# Altium PCB PD Breakout.PcbDoc
Units mm, origin at the board's own origin, x right, y up, seen from the top; angles counter-clockwise.
Board outline 32.38 x 43.05 mm, 2 copper layers (Top Layer, Bottom Layer), stack 1.569 mm thick; 41 components, 22 nets, 104 pads, 19 vias.
Unrouted connection lines stored in the file: 7.
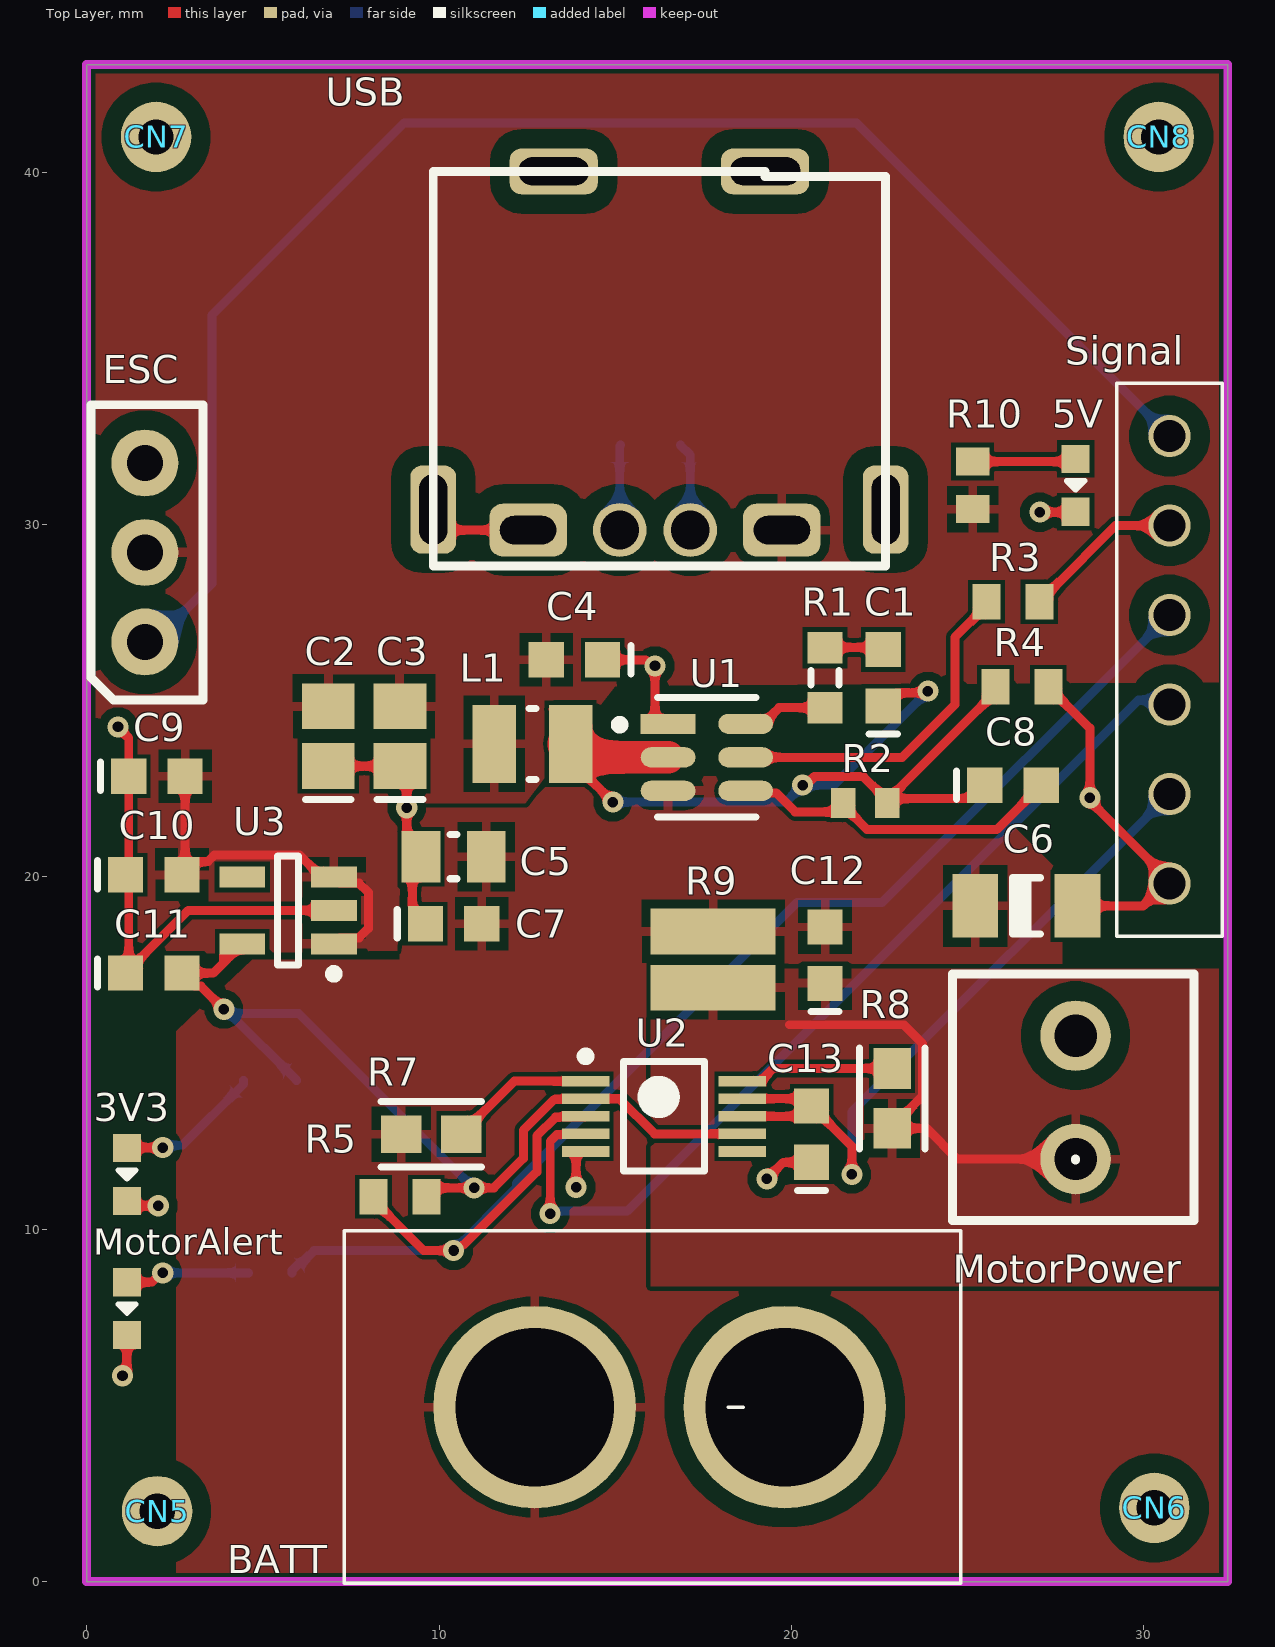
[diagram p0: Top Layer view]
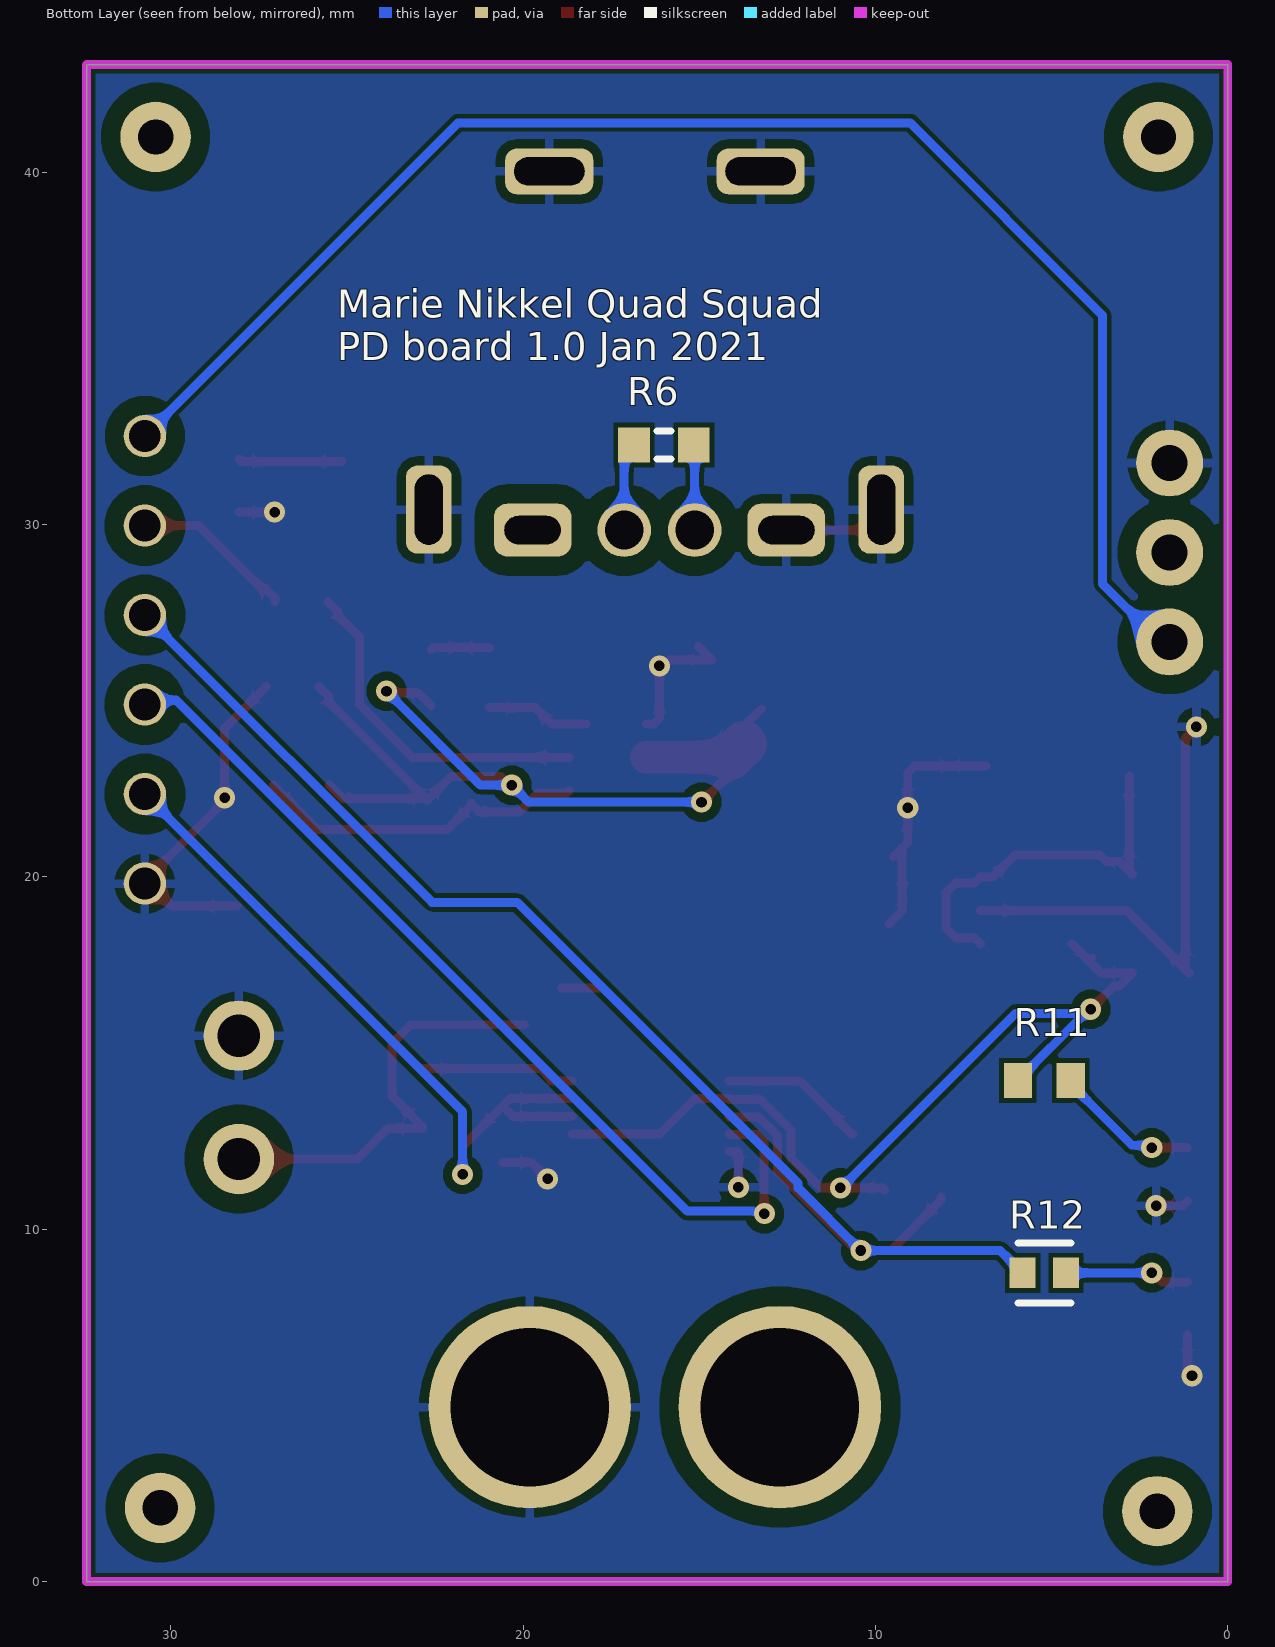
[diagram p1: Bottom Layer view, seen from below]
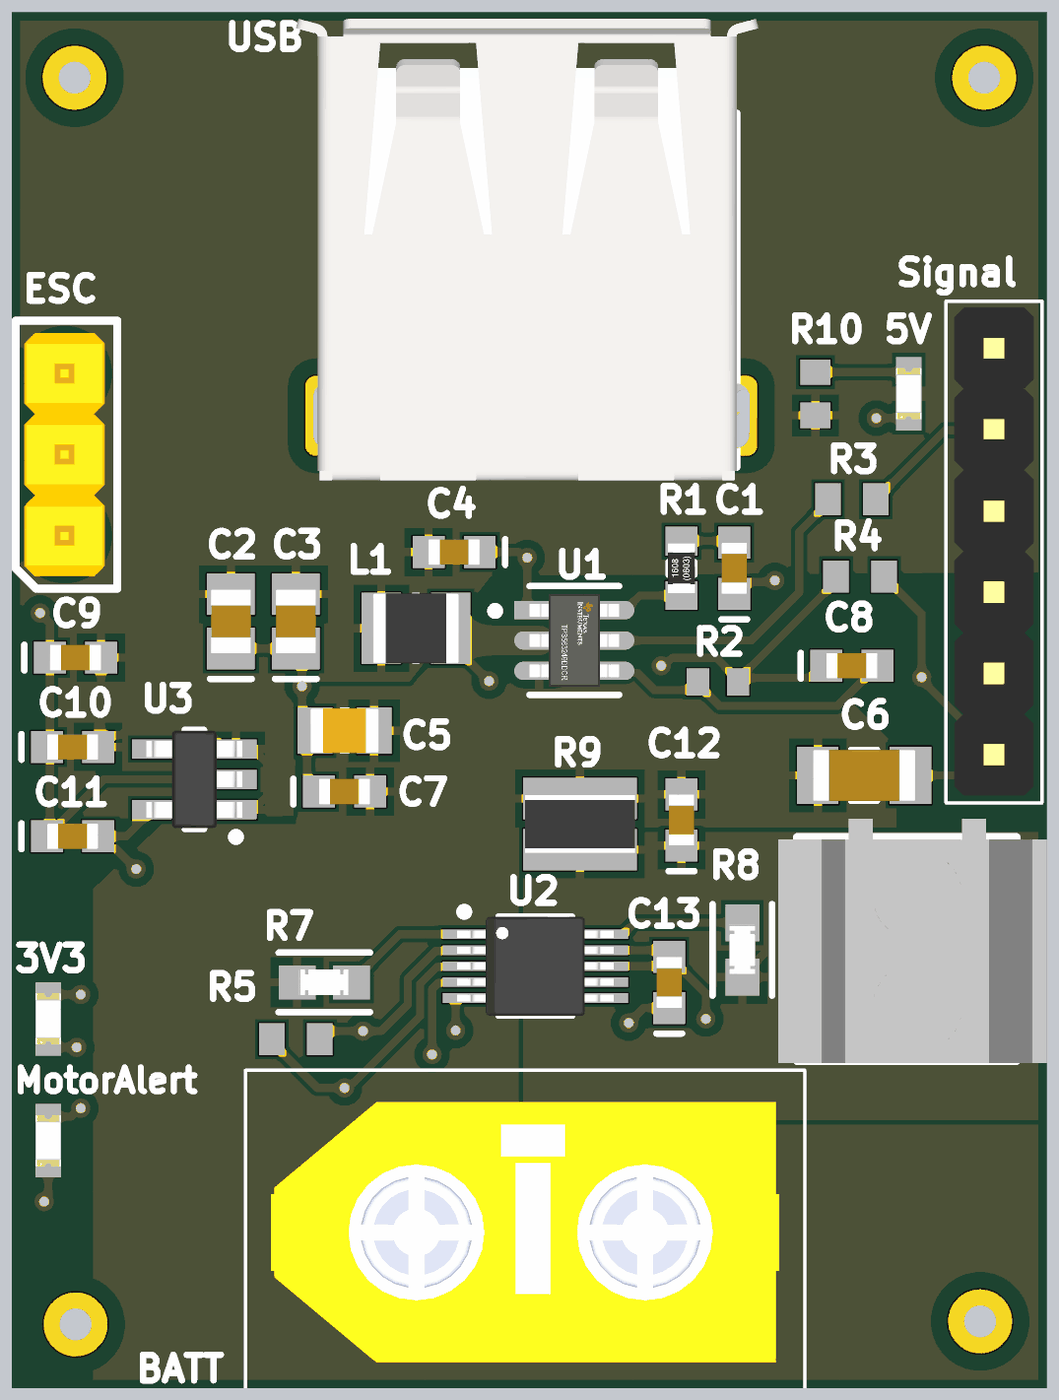
[diagram p2: 3D render of the assembled board from above, using the file's embedded part models]

## Layer stack, top to bottom
Top Solder: solder mask 0.0254, SM-001, Dk 4
Top Layer: signal copper 0.035
Dielectric 1: core 1.4986, Core-043, Dk 4.3
Bottom Layer: signal copper 0.035
Bottom Solder: solder mask 0.0254, SM-001, Dk 4

## Board outline
0,0 0,43.053 32.385,43.053 32.385,0

## Design rules (kind name [scope] priority, off if disabled: settings)
Clearance [All] p1: gap=0.254 ignorepadtopadclearanceinfootprint=TRUE except(0: Arc-Hole Track-Hole SMDPad-Hole THPad-Hole Via-Hole Fill-Hole Poly-Hole Region-Hole Text-Hole; 0.127: Arc-Arc Arc-Track Arc-Fill Arc-Poly Arc-Region Track-Track Track-Fill Track-Poly Track-Region SMDPad-SMDPad SMDPad-Fill SMDPad-Poly SMDPad-Region Fill-Fill Fill-Poly Fill-Region Poly-Poly Poly-Region Region-Region; 0.2: Arc-SMDPad Arc-THPad Track-SMDPad Track-THPad; 0.54: THPad-THPad THPad-Fill THPad-Poly THPad-Region)
HoleSize [All] p1: absolutevalues=TRUE maxlimit=4 minlimit=0.025 maxpercent=80.000 minpercent=20.000
PolygonConnect [All] p1: connectstyle=Relief reliefconductorwidth=0.254 reliefentries=4 polygonreliefangle="90 Angle" airgapwidth=0.254
RoutingVias [All] p1: holewidth=0.711 width=1.27 viastyle="Through Hole" minholewidth=0.711 minwidth=1.27 maxholewidth=0.711 maxwidth=1.27
SolderMaskExpansion [All] p1: expansion=0.05 istentingtop=FALSE
Width [All] p1: maxlimit=12.7 minlimit=0.127 preferedwidth=0.305 minimp=50.000000 maximp=50.000000 favimp=50.000000
29 further rules are at their usual default settings.

## Components (designator, comment, footprint, x,y, rotation, side; value= is the part's Value field where it differs from the comment)
3V3 "LT Q39G-Q1OO-25-1" FP-LB_Q39E-MFG 1.143,11.557 r90 top (schematic designator D2)
5V "LBQ39E-N1OO-35-1" FP-LB_Q39E-MFG 28.067,31.115 r90 top (schematic designator D1)
BATT "XT-60, Male, 1x2, Through hole" "XT-60 Male" 19.812,4.953 r180 top (schematic designator CN1)
C1 "0.1uF, 50V, 10%, X7R, 0603" "CAPC1608N(0603\")" 22.606,25.654 r90 top
C2 "22uF 35V 0805 SMD, Ceramic" "CAPC2012N(0805\")" 6.858,23.995 r90 top value=22µF
C3 "22uF 35V 0805 SMD, Ceramic" "CAPC2012N(0805\")" 8.89,23.995 r90 top value=22µF
C4 "Placeholder_Capacitor_0603" "CAPC1608N(0603\")" 13.843,26.162 r180 top value=DNP
C5 "10uF, 25V, X5R, 0805" CAPC2013X12N 10.414,20.574 r180 top
C6 "Placeholder_Capacitor_1206" "CAPC3216N(1206\")" 26.67,19.177 r180 top value=DNP
C7 "0.1uF, 50V, 10%, X7R, 0603" "CAPC1608N(0603\")" 10.414,18.669 r0 top
C8 "Placeholder_Capacitor_0603" "CAPC1608N(0603\")" 26.289,22.606 r0 top value=DNP
C9 "1uF 25V 0603 SMD, Ceramic" "CAPC1608N(0603\")" 1.994,22.86 r0 top value=1µF
C10 "0.1uF 16V 0603 SMD, Ceramic" "CAPC1608N(0603\")" 1.905,20.066 r0 top value=0.1µF
C11 "4.7uF 10V 0603 SMD, Ceramic" "CAPC1608N(0603\")" 1.905,17.272 r0 top value=4.7µF
C12 "0.1uF, 50V, 10%, X7R, 0603" "CAPC1608N(0603\")" 20.955,17.78 r90 top
C13 "10 nF, 50V 0603 SMD, Ceramic" "CAPC1608N(0603\")" 20.574,12.7 r90 top value=10nF
CN5 "Plated Hole, 1mm" PLATED_HOLE_1mm#1 2,2 r90 top locked
CN6 "Plated Hole, 1mm" PLATED_HOLE_1mm#2 30.39,2 r90 top locked
CN7 "Plated Hole, 1mm" PLATED_HOLE_1mm#3 2,41.05 r90 top locked
CN8 "Plated Hole, 1mm" PLATED_HOLE_1mm#4 30.39,41.05 r90 top locked
ESC "Header, Male, 1x3, Pitch: 0.1\" (2.54mm), THT" "Header, Male, 1x3, Pitch: 0.1\" (2.54mm),THT" 1.651,29.21 r90 top (schematic designator CN3)
L1 "DFE252012P-1R5M=P2" INDC2520X12N 12.649,23.777 r180 top
MotorAlert "LSQ976-NR-1" FP-LB_Q39E-MFG 1.143,7.747 r90 top (schematic designator D3)
MotorPower "2x1 Terminal Block 3.5mm" "2x1 Terminal Block 3.5mm-Footprint-1" 28.067,13.744 r90 top (schematic designator J1)
R1 "0R, 1%, 1/10W, 0603 SMD" "RESC1608N(0603\")" 20.955,25.654 r90 top value=0R
R2 "ERJ-3EKF7322V" RESC1608X55X30LL15T15 22.098,22.098 r0 top
R3 "RC0603FR-0710KL" RESC1608X55X25ML10T15 26.289,27.813 r0 top
R4 "RC0603FR-0710KL" RESC1608X55X25ML10T15 26.543,25.4 r180 top
R5 "RC0603FR-0710KL" RESC1608X55X25ML10T15 8.89,10.922 r0 top
R6 "0R, 1%, 1/10W, 0603 SMD" "RESC1608N(0603\")" 16.002,32.258 r180 bottom value=0R
R7 "ERJ3EKF10R0V" FP-ERJ3EK-IPC_A 9.779,12.7 r180 top
R8 "ERJ3EKF10R0V" FP-ERJ3EK-IPC_A 22.86,13.716 r270 top
R9 "3mR, 1%, 1W, 1206" RESC1632X07M 17.78,17.653 r270 top
R10 "ERJ-3EKF5360V" RESC1608X55X30NL15T15 25.146,31.115 r90 top
R11 "RC0603FR-07110RL" RESC1608X55X25ML10T15 5.207,14.224 r180 bottom
R12 "CRCW0603330RFKEA" FP-CRCW0603-e3-IPC_C 5.207,8.763 r180 bottom
Signal "Header, Male, 1x6" "Header, Male, 1X6" 30.734,19.812 r90 top (schematic designator CN4)
U1 "TPS563249DDCR" FP-DDC0005A-IPC_B 17.602,23.396 r0 top
U2 "INA381A3IDGSR" TSSOP50P490X110-10N 16.383,13.208 r0 top
U3 "LP2981-33DBVR" SOT95P280X145-5N 5.715,19.05 r180 top
USB "USB - Type A Female" "USB - Type A Female-Footprint-1" 16.129,29.845 r180 top (schematic designator CN2)

## Footprints (in the part's own frame and the unit in brackets; to place one, negate y for a bottom-side part, rotate by r counter-clockwise, add the part's x,y. Pads: shape width x height; smd on the part's side, far side on the other; paste and mask are expansions set on the pad)
"2x1 Terminal Block 3.5mm-Footprint-1" [mm]
  round 2 hole 1.2: 1(-1.75,0) 2(1.75,0)
  silkscreen extent -3.5,-3.37 3.5,3.49, body extent -3.57,-4.32 4.08,4.08, height 13.05
"CAPC1608N(0603\")" [mm] "Chip Capacitor, Body 1.6x0.8mm (0603\"), IPC Medium Density"
  rect 1x1 smd: 1(-0.8,0) 2(0.8,0)
  silkscreen extent -1.6,-0.4 -1.6,0.4, body extent -0.8,-0.4 0.8,0.4, height 0.9
"CAPC2012N(0805\")" [mm] "Chip Capacitor, Body 2.0x1.3mm (0805\"), IPC Medium Density"
  rect 1.3x1.5 smd: 1(-0.85,0) 2(0.85,0)
  silkscreen extent -1.8,-0.65 -1.8,0.65, body extent -1,-0.62 1,0.63, height 1
CAPC2013X12N [mm] "Chip Capacitor, 2-Leads, Body 2.05x1.30mm, IPC Medium Density"
  rect 1.1x1.45 smd: 1(-0.925,0) 2(0.925,0)
  silkscreen extent -0.1,-0.63 0.1,0.63, body extent -1.07,-0.7 1.07,0.7, height 1.25
"CAPC3216N(1206\")" [mm] "Chip Capacitor, Body 3.2x1.6mm (1206\"), IPC Medium Density"
  rect 1.3x1.8 smd: 1(-1.45,0) 2(1.45,0)
  silkscreen extent -0.4,-0.8 0.4,0.8, body extent -1.6,-0.8 1.6,0.8, height 1
FP-CRCW0603-e3-IPC_C [mm]
  rect 0.735x0.862 smd paste+0 mask+0: 1(-0.615,0) 2(0.615,0)
  silkscreen extent -0.75,-0.85 0.75,0.85, body extent -0.77,-0.42 0.78,0.42, height 0.5
FP-DDC0005A-IPC_B [mm]
  rect 1.554x0.572 smd paste+0 mask+0: 1(-1.1,0.95)
  rrect100% 1.554x0.572 smd paste+0 mask+0: 2(-1.1,0) 3(-1.1,-0.95) 4(1.1,-0.95) 5(1.1,0) 6(1.1,0.95)
  silkscreen extent -2.6,-1.7 1.4,1.7, body extent -2.13,-1.7 2.13,1.7, height 0.25
FP-ERJ3EK-IPC_A [mil]
  rect 45.53x41.82 smd paste+0 mask+0: 1(-33.5,0) 2(33.5,0)
  silkscreen extent -56,-37 56,37, body extent -76,-41 76,41, height 10
FP-LB_Q39E-MFG [mm]
  rect 0.8x0.8 smd paste+0 mask+0: 1(-0.75,0) 2(0.75,0)
  silkscreen extent -0.13,-0.25 0.13,0.25, body extent -1.25,-0.55 1.25,0.55, height 0.25
"Header, Male, 1x3, Pitch: 0.1\" (2.54mm),THT" [mm]
  round 1.9 hole 1.016: 1(-2.54,0) 2(0,0) 3(2.54,0)
  silkscreen extent -4.19,-1.65 4.19,1.52, body extent -3.81,-1.27 3.81,1.27, height 9.5
"Header, Male, 1X6" [mm]
  round 1.2 hole 0.9: 1(0,0) 2(2.54,0) 3(5.08,0) 4(7.62,0) 5(10.16,0) 6(12.7,0)
  silkscreen extent -1.5,-1.5 14.2,1.5, body extent -1.27,-1.24 14,1.25, height 8.54
INDC2520X12N [mm] "Chip Inductor, 2-Leads, Body 2.50x2.00mm, IPC Medium Density"
  rect 1.23x2.22 smd: 1(-1.085,0) 2(1.085,0)
  silkscreen extent -0.1,-1.01 0.1,1.01, body extent -1.35,-1.1 1.35,1.1, height 1.2
PLATED_HOLE_1mm#1 [mm]
  round 2 hole 1: 1(0,0)
PLATED_HOLE_1mm#2 [mm]
  round 2 hole 1: 1(0.095,0.09)
PLATED_HOLE_1mm#3 [mm]
  round 2 hole 1: 1(-0.048,0.032)
PLATED_HOLE_1mm#4 [mm]
  round 2 hole 1: 1(-0.048,-0.037)
"RESC1608N(0603\")" [mm] "Chip Resistor, Body 1.6x0.8mm (0603\"), IPC Medium Density"
  rect 0.9x1 smd: 1(-0.85,0) 2(0.85,0)
  silkscreen extent -0.2,-0.4 0.2,0.4, body extent -0.77,-0.42 0.78,0.43, height 0.44
RESC1608X55X25ML10T15 [mm] "Chip Resistor, 2-Leads, Body 1.60x0.80mm, IPC Low Density"
  rect 0.8x1 smd: 1(-0.75,0) 2(0.75,0)
  body extent -0.85,-0.45 0.85,0.45, height 0.55
RESC1608X55X30LL15T15 [mm] "Chip Resistor, 2-Leads, Body 1.60x0.80mm, IPC High Density"
  rect 0.7x0.85 smd: 1(-0.625,0) 2(0.625,0)
  body extent -0.87,-0.48 0.87,0.48, height 0.55
RESC1608X55X30NL15T15 [mm] "Chip Resistor, 2-Leads, Body 1.60x0.80mm, IPC Medium Density"
  rect 0.8x0.95 smd: 1(-0.675,0) 2(0.675,0)
  body extent -0.87,-0.48 0.87,0.48, height 0.55
RESC1632X07M [mm] "Chip Resistor, 2-Leads, Body 1.60x3.20mm, IPC Low Density"
  rect 1.3x3.55 smd: 1(-0.8,0) 2(0.8,0)
  body extent -0.9,-1.73 0.9,1.72, height 0.7
SOT95P280X145-5N [mm] "SOT23, 5-Leads, Body 2.90x2.80mm, Pitch 0.95mm, IPC Medium Density"
  rect 1.3x0.6 smd: 1(-1.3,0.95) 2(-1.3,0) 3(-1.3,-0.95) 4(1.3,-0.95) 5(1.3,0.95)
  silkscreen extent -1.43,-1.55 0.3,1.92, body extent -1.5,-1.53 1.5,1.53, height 1.45
TSSOP50P490X110-10N [mm] "TSSOP, 10-Leads, Body 3.00x3.00mm, Pitch 0.50mm, IPC Medium Density"
  rect 1.35x0.3 smd: 1(-2.225,1) 2(-2.225,0.5) 3(-2.225,0) 4(-2.225,-0.5) 5(-2.225,-1) 6(2.225,-1) 7(2.225,-0.5) 8(2.225,0) 9(2.225,0.5) 10(2.225,1)
  silkscreen extent -2.35,-1.55 1.15,1.82, body extent -2.45,-1.55 2.45,1.55, height 1.1
"USB - Type A Female-Footprint-1" [mil]
  rrect50% 86.6x59.06 hole 31.5 slot 63 at 0 deg: 1(-141.74,0) 4(141.74,0)
  round 60 hole 43.31: 2(-39.38,0) 3(39.38,0)
  rrect50% 51.18x98.43 hole 31.5 slot 78.74 at 90 deg: 5(247.76,-22.84) 8(-257.76,-22.84)
  rrect50% 98.43x51.18 hole 31.5 slot 78.74 at 0 deg: 6(113.12,-400.78) 7(-123.1,-400.78)
  silkscreen extent -258,-401 248,40, body extent -310,-512 310,57, height 290
"XT-60 Male" [mm]
  round 5.75 hole 4.5: 1(0,0) 2(7.1,0)
  silkscreen extent -5,-5 12.5,5, body extent -4.2,-4 11.7,4.15, height 16.5

## Part data
3V3: library part CMP-00064-3, "LED GREEN DIFFUSED 0603 SMD", Case/Package=SMD/SMT, Color=Green, Forward Current=15mA, Forward Voltage=2.85V, Max Operating Temperature=85°C, Min Operating Temperature=-40°C, Reverse Voltage=5V, Test Current=5mA, Depth=0.9mm, Dominant Wavelength=530nm, Length=1.7mm, Lens Style=Diffused,Colorless,Rectangular, Luminous Flux=0.55lm, Luminous Intensity=280mcd, Mount="Surface Mount", Number of Elements=1, Number of LEDs=1, Number of Pins=2, Packaging="Tape and Reel", Radiation Hardening=No
5V: library part CMP-00063-3, "LED BLUE DIFFUSED 0603 SMD", Case Code (Imperial)=0603, Case Code (Metric)=1608, Color=Blue, Forward Voltage=2.85V, Lens Color=White, Test Current=5mA, Case/Package=0603, Dominant Wavelength=470nm, Height=0.4mm, Length=1.6mm, Lens Size=0.8mm, Lens Style=Flat,Diffused,Colorless,Rectangular, Lens Transparency=Diffused, Luminous Flux=0.13lm, Luminous Intensity=42mcd, Mount="Surface Mount", Number of LEDs=1, Number of Pins=2, Packaging="Tape and Reel", Radiation Hardening=No, Viewing Angle=130°, Width=0.8mm
BATT: library part CMP-005-0041-1, Component Type="Standard (No BOM)", Date Published=2016-09-08, Design Item ID="XT-60, Male, 1x2, Through hole", Pin Count=2, Publisher="Andy Bates", Source=AUVic_Schematic_Library_Connectors.SchLib
C1 C7 C12: library part CMP-006-0007-1, "0.1µF ±10% Ceramic Capacitor X7R 0603 (1608 Metric)", Capacitance=0.1µF, Operating Temperature="-55°C ~ 125°C", Package / Case="0603 (1608 Metric)", Component Type=Standard, ComponentLink1Description=Digi-Key, ComponentLink1URL=https://www.digikey.ca/product-detail/en/tdk-corporation/C1608X7R1H104M080AA/445-5098-1-ND/2093713, Created By="Poorna Chander Kalidas", Design Item ID="0.1uF, 50V, 10%, X7R, 0603", Mounting Type="Surface Mount, MLCC", Pin Count=2, Source=AUVic_Schematic_Library_Capacitors.SchLib
C2 C3: library part CMP-006-0036-1, "Capacitor, Ceramic, 35V, +/- 20%, 0805 SMD, X5R", Component Type=Standard, Design Item ID="22uF 35V 0805 SMD, Ceramic", PackageDescription="Chip Capacitor", Pin Count=2, Published=14-06-01, Publisher=AUVic, Source=AUVic_Schematic_Library_Capacitors.SchLib
C4 C8: library part CMP-006-0054-1, "Placeholder 0603 SMT Footprint", Component Type="Standard (No BOM)", Date Created=2016-06-26, Design Item ID=Placeholder_Capacitor_0603, Made By="Ashwin Sira", PackageDescription="Chip Capacitor", Pin Count=2, Publisher=AUVic, Source=AUVic_Schematic_Library_Capacitors.SchLib
C5: library part CMP-00114-1, "0805 10 uF 25 V ±10% Tolerance X5R SMT Multilayer Ceramic Capacitor", Capacitance=10uF, Case Code (Imperial)=0805, Case Code (Metric)=2012, Dielectric=X7R, Max Operating Temperature=85°C, Min Operating Temperature=-55°C, Package Quantity=1, Resistor Type=Ceramic, Tolerance=10%, Voltage Rating=25V, Case/Package=0805, Height=1.25mm, Lead Free="Lead Free", Length=0.079inch, Mount="Surface Mount", Number of Pins=2, Packaging="Tape and Reel", REACH SVHC="No SVHC", Termination=SMD/SMT, Thickness=0.053inch, Voltage Rating (DC)=25V, Width=0.049inch
C6: library part CMP-006-0056-1, "Placeholder 1206 SMT Footprint", Component Type="Standard (No BOM)", Date Created=2016-06-26, Design Item ID=Placeholder_Capacitor_1206, Made By="Ashwin Sira", PackageDescription="Chip Capacitor", Pin Count=2, Publisher=AUVic, Source=AUVic_Schematic_Library_Capacitors.SchLib
C9: library part CMP-006-0027-1, "Capacitor, Ceramic, 25V, +/- 10%, 0603 SMD, X5R", Component Type=Standard, Created By="Andy Bates", Design Item ID="1uF 25V 0603 SMD, Ceramic", MFG=Murata-Electronics-North-America, MFG#=GRM188R61E105KA12D, PackageDescription="Chip Capacitor", Pin Count=2, Published=16-06-27, Publisher=AUVic, Source=AUVic_Schematic_Library_Capacitors.SchLib
C10: library part CMP-006-0005-1, "Capacitor, Ceramic, 16V, +/- 10%, 0603 SMD, X7R", Component Type=Standard, Created By="Andy Bates", Design Item ID="0.1uF 16V 0603 SMD, Ceramic", PackageDescription="Chip Capacitor", Pin Count=2, Published=16-04-26, Publisher=AUVic, Source=AUVic_Schematic_Library_Capacitors.SchLib
C11: library part CMP-006-0043-1, "Capacitor, Ceramic, 10V, +/- 10%, 0603 SMD, X5R", Component Type=Standard, Created By="Ashwin Sira", Design Item ID="4.7uF 10V 0603 SMD, Ceramic", MFG=Samsung, MFG#=GRM188R61A475KE15D, PackageDescription="Chip Capacitor", Pin Count=2, Published=16-06-23, Publisher=AUVic, Source=AUVic_Schematic_Library_Capacitors.SchLib
C13: library part CMP-006-0010-1, "Capacitor, Ceramic, 50V, +/- 10%, 0603 SMD", Component Type=Standard, Created By=Gabriel, Design Item ID="10 nF, 50V 0603 SMD, Ceramic", MFG=Samsung, MFG#=GRM188R61A475KE15D, PackageDescription="Chip Capacitor", Pin Count=2, Published=16-06-23, Publisher=AUVic, Source=AUVic_Schematic_Library_Capacitors.SchLib
CN5 CN6 CN7 CN8: library part CMP-054-0000-1, Component Type="Standard (No BOM)", Created By="Ashwin Sira", Date Created=2016-07-10, Design Item ID="Plated Hole, 1mm", Pin Count=1, Publisher=AUVic, Source=AUVic_Integrated_Library_Virtual_Components.SchLib
ESC: library part CMP-005-0025-1, Component Type=Standard, Created By="Ashwin Sira", Date Published=2016-03-03, Design Item ID="Header, Male, 1x3, Pitch: 0.1\" (2.54mm), THT", Pin Count=3, Publisher=AUVic, Source=AUVic_Schematic_Library_Connectors.SchLib
L1: library part CMP-00112-1, "Ind Metal Alloy Shielded 1.5uH 20% 1MHz Powdered Iron 2.6A 1008 T/R", Case Code (Imperial)=1008, Case Code (Metric)=2520, Current Rating=3.5A, DC Resistance (DCR)=60mR, Inductance=1.5uH, Max DC Current=2.6A, Max Operating Temperature=125°C, Min Operating Temperature=-40°C, Resistor Type="Wirewound,Metal Alloy", Test Frequency=1MHz, Tolerance=20%, Case/Package=1008, Core Material=Ferrite, Depth=2mm, Height - Seated (Max)=0.039inch, Length=0.098inch, Mount="Surface Mount", Packaging="Tape and Reel", Shielding=Shielded, Width=0.079inch
MotorAlert: library part CMP-00066-2, "LED Red 645nm 2-Pin Chip 0603(1608Metric) T/R", Case Code (Imperial)=0603, Case Code (Metric)=1608, Color=Red, Forward Current=25mA, Forward Voltage=2.5V, Lens Color=White, Max Operating Temperature=85°C, Min Operating Temperature=-30°C, Package Quantity=1, Power Dissipation=65mW, Reverse Voltage=12V, Test Current=20mA, Case/Package=0603, Depth=0.9mm, Dominant Wavelength=633nm, Height=0.8mm, Illumination Color=Red, Length=1.7mm, Lens Size=0.8mm, Lens Style=Diffused,Flat,Colorless,Rectangular, Lens Transparency=Diffused, Luminous Flux=0.33lm, Luminous Intensity=180mcd, Mount="Surface Mount", Number of Elements=1, Number of LEDs=1, Number of Pins=2, Packaging="Tape and Reel", Radiation Hardening=No, Viewing Angle=160°, Width=0.8mm
MotorPower: library part CMP-00117-2, "P=3.5mm Screw terminal RoHS", LCSC Part #=C474892, Created By="Miguel Manguerra"
R1 R6: library part CMP-047-0001-1, Component Type=Standard, Created On=14-05-31, Design Item ID="0R, 1%, 1/10W, 0603 SMD", Last Edited=14-05-31, Made By="Ashwin Sira", Owned By=AUVic, Pin Count=2, Source=AUVic_Schematic_Library_Resistors.SchLib
R2: library part CMP-00029-1, "Res Thick Film 0603 73.2K Ohm 1% 0.1W(1/10W) ±100ppm/C Pad SMD Automotive T/R", Case Code (Imperial)=0603, Case Code (Metric)=1608, Max Operating Temperature=155°C, Max Power Dissipation=100mW, Min Operating Temperature=-55°C, Package Quantity=1, Resistance=73.2kR, Temperature Coefficient=100ppm/°C, Tolerance=1%, Voltage Rating=75V, Voltage Rating (DC)=50V, Case/Package=0603, Composition="Thick Film", Contact Plating=Tin, Depth=0.8mm, Features="Automotive AEC-Q200", Height=0.022inch, Lead Free="Lead Free", Length=1.6mm, Military Standard=Not, Mount="Surface Mount", Number of Terminations=2, Packaging="Tape and Reel", Power Rating=100mW, Radiation Hardening=No, REACH SVHC="No SVHC", Termination=SMD/SMT, Width=0.031inch
R3 R4 R5: library part CMP-00037-1, "Res General Purpose Thick Film 0603 10K Ohm 1% 1/10W ±100ppm/°C Molded SMD Paper T/R", Case Code (Imperial)=0603, Case Code (Metric)=1608, Max Operating Temperature=155°C, Min Operating Temperature=-55°C, Power Rating=100mW, Resistance=10kR, Temperature Coefficient=100ppm/°C, Tolerance=1%, Voltage Rating=75V, Voltage Rating (DC)=50V, Case/Package=0603, Composition="Thick Film", Depth=0.8mm, Height=0.45mm, Lead Free="Lead Free", Lead Pitch=0.3mm, Length=1.6mm, Military Standard=Not, Number of Pins=2, Packaging="Tape and Reel", REACH SVHC="No SVHC", Termination=SMD/SMT, Weight=7.1E-05oz, Width=0.8mm
R7 R8: library part CMP-00034-2, "PANASONIC - ERJ3EKF10R0V - SMD Chip Resistor, 0603 [1608 Metric], 10 ohm, ERJ3EK Series, 75 V, Thick Film, 100 mW", Case Code (Imperial)=0603, Case Code (Metric)=1608, Max Operating Temperature=155°C, Max Power Dissipation=100mW, Min Operating Temperature=-55°C, Package Quantity=5000, Resistance=10R, Temperature Coefficient=100ppm/°C, Tolerance=1%, Voltage Rating=75V, Case/Package=0603, Composition="Thick Film", Contact Plating=Tin, Depth=0.8mm, Features="Automotive AEC-Q200", Height=0.45mm, Lead Free="Lead Free", Length=1.6mm, Military Standard=Not, Mount="Surface Mount", Number of Pins=2, Number of Terminations=2, Packaging="Tape and Reel", Power Rating=100mW, Radiation Hardening=No, REACH SVHC="No SVHC", Termination=SMD/SMT, Voltage Rating (DC)=75V, Width=0.8mm, Working Voltage=75V
R9: library part CMP-00122-4, "3 mOhms ±1% 1W Chip Resistor Wide 1206 (3216 Metric), 0612", Resistance=3mR
R10: library part CMP-00071-1, "SMD Chip Resistor, 0603 [1608 Metric], 536 ohm, ERJ3EK Series, 75 V, Thick Film, 100 mW", Case Code (Imperial)=0603, Case Code (Metric)=1608, Max Operating Temperature=155°C, Max Power Dissipation=100mW, Min Operating Temperature=-55°C, Package Quantity=1, Resistance=536R, Temperature Coefficient=100ppm/°C, Tolerance=1%, Voltage Rating=75V, Voltage Rating (DC)=50V, Case/Package=0603, Composition="Thick Film", Contact Plating=Tin, Depth=0.8mm, Features="Automotive AEC-Q200", Height=0.022inch, Lead Free="Lead Free", Length=1.6mm, Military Standard=Not, Mount="Surface Mount", Number of Terminations=2, Packaging="Tape and Reel", Power Rating=100mW, REACH SVHC="No SVHC", Termination=SMD/SMT, Width=0.8mm
R11: library part CMP-00069-1, "RES SMD 110 OHM 1% 1/10W 0603", Case Code (Imperial)=0603, Case Code (Metric)=1608, Max Operating Temperature=155°C, Max Power Dissipation=100mW, Min Operating Temperature=-55°C, Package Quantity=1, Resistance=110R, Temperature Coefficient=100ppm/°C, Tolerance=1%, Voltage Rating=50V, Working Voltage=75V, Case/Package=0603, Composition="Thick Film", Depth=0.8mm, Features="Moisture Resistant", Height=0.022inch, Lead Free="Lead Free", Length=1.6mm, Military Standard=Not, Number of Terminations=2, Packaging="Tape and Reel", Power Rating=100mW, Termination=SMD/SMT, Voltage Rating (DC)=50V, Width=0.031inch
R12: library part CMP-00067-2, "Res Thick Film 0603 330 Ohm 1% 0.1W(1/10W) +/-100ppm/ßC Pad SMD Automotive T/R", Case Code (Imperial)=0603, Case Code (Metric)=1608, Max Operating Temperature=155°C, Max Power Dissipation=100mW, Min Operating Temperature=-55°C, Package Quantity=10, Resistance=330R, Temperature Coefficient=100ppm/°C, Tolerance=1%, Voltage Rating=75V, Case/Package=0603, Composition="Thick Film", Contact Plating=Tin, Depth=0.85mm, Features="Automotive AEC-Q200", Height=0.45mm, Lead Free="Lead Free", Length=1.55mm, Military Standard=Not, Mount="Surface Mount", Number of Terminations=2, Packaging="Tape and Reel", Power Rating=100mW, Radiation Hardening=No, REACH SVHC=Unknown, Termination=SMD/SMT, Voltage Rating (DC)=75V, Weight=7.1E-05oz, Width=0.033inch
Signal: library part CMP-005-0031-1, "1x6, Pads Pitch: 0.1\" (2.54mm), Through hole", Supplier 1 Part Number=952-2270-ND, Component Type=Standard, Design Item ID="Header, Male, 1x6", Made Bates="Andy Bates", Pin Count=6, Source=AUVic_Schematic_Library_Connectors.SchLib
U1: library part CMP-044-0004-1, "17-V, 3-A, constant 1.4-MHz synchronous step-down voltage regulator 6-SOT-23-THIN -40 to 125"
U2: library part CMP-00120-1, "26V, 350kHz current sense amplifier w/ integrated over-current comparator 10-VSSOP -40 to 125"
U3: library part CMP-044-0003-2, "IC REG LINEAR 3.3V 100MA SOT23-5", Case/Package=SOT-23, Dropout Voltage=200mV, Input Bias Current=600uA, Max Input Voltage=16V, Max Operating Temperature=125°C, Max Output Current=100mA, Min Input Voltage=2.2V, Min Operating Temperature=-40°C, Nominal Output Voltage=3.3V, Output Voltage Accuracy=2%, Package Quantity=1, Accuracy=2%, Contact Plating=Tin,Matte, Lead Free="Lead Free", Mount="Surface Mount", Number of Outputs=1, Number of Pins=5, Number of Regulators=1, Output Current=100mA, Output Type=Fixed, Output Voltage=3.3V, Packaging="Tape and Reel", Polarity=Positive, Quiescent Current=600uA, Radiation Hardening=No, REACH SVHC="No SVHC"
USB: library part CMP-00116-2, "USB - Type A Female USB 2.0 THT", LCSC Part #=C168725, Created By="Miguel Manguerra"

## Via types
v1: diameter 0.6, hole 0.3, Top Layer to Bottom Layer, tented both sides, 19 vias

## Nets (pads, with @x,y where several pads share a name; then routed paths per layer and width w, separated by ;. In a path a pad name is that pad's centre, name@x,y a point inside that pad or via, vN(x,y) a via of type N, cw(c..) or ccw(c..) an arc to the next point about the centre after c; other vN are vias at no path point)
3V3: C11.2 R5.2 R11.1 U2.2 U2.7 U3.5 | length 26.4
  Top Layer w0.254: v1(3.894,16.246) 3.241,16.899 3.078,16.899 C11.2 3.587,17.272 U3.5 ; R5.2@9.74,11.122 9.794,11.176 v1(10.994,11.176) 11.557,11.176 12.394,12.013 12.394,12.809 13.27,13.685 13.49,13.685 14.135,13.685 U2.2 15.121,13.708 16.121,12.708 U2.7
  Bottom Layer w0.254: v1(3.894,16.246) 3.935,16.246 v1@4.052,16.129 ; R11.1 v1@4.052,16.129 ; v1(10.994,11.176) 10.964,11.176 6.011,16.129 v1@4.052,16.129
5V: C2.2 C3.2 C4.2 C9.2 C10.2 ESC.2 L1.2 R10.1 U3.1 U3.3 USB.1 | length 10.8
  Top Layer w0.254: C10.2 C10.2@2.794,20.155 ; C9.2 C10.2@2.794,20.155 ; U3.1 7.188,18.273 7.725,18.273 7.992,18.54 7.992,19.56 7.725,19.827 7.188,19.827 U3.3 6.665,20 6.038,20.627 3.63,20.627 3.442,20.439 3.078,20.439 C10.2@2.794,20.155
EN: R3.2 Signal.5 | length 4.6
  Top Layer w0.254: R3.2 27.039,27.913 27.312,28.186 27.412,28.186 29.198,29.972 Signal.5
ESC_Signal: ESC.1 Signal.6 | length 43.3
  Bottom Layer w0.254: ESC.1 1.905,26.67 3.556,28.321 3.556,35.941 9.017,41.402 21.844,41.402 Signal.6
GND: 3V3.1 5V.1 BATT.1 C2.1 C3.1 C4.1 C5.2 C6.1 C7.1 C9.1 C10.1 C11.1 C13.1 ESC.3 MotorAlert.1 MotorPower.2 R4.1 Signal.1 U1.1 U2.5 U3.2 USB.4 USB.5 USB.6 USB.7 USB.8 | length 45.8
  Top Layer w0.254: v1(0.889,24.257) 0.889,24.248 1.194,23.943 1.194,20.066 C11.1@1.194,17.361 ; v1(1.016,5.842) 1.016,5.936 1.143,6.063 MotorAlert.1 ; C11.1 C11.1@1.194,17.361 ; 3V3.1 1.282,10.668 v1(2.032,10.668) ; ESC.3 ESC.3@2.096,31.75 ; C2.1 C3.1 9.083,22.952 9.083,20.98 C5.2@9.241,20.822 ; U3.2 2.883,19.05 C11.1@1.194,17.361 ; USB.5@9.328,31.223 9.836,30.715 USB.5 9.836,30.353 10.344,29.845 USB.4 ; C5.2 C5.2@9.241,20.822 ; C7.1 9.241,19.042 C5.2@9.241,20.822 ; v1(13.889,11.196) 13.889,12.185 13.912,12.208 U2.5 ; C4.1@15.016,26.535 C4.1 15.862,26.162 16.035,25.989 v1(16.129,25.989) 16.129,24.505 16.288,24.346 U1.1 ; BATT.1@19.37,5.395 BATT.1 ; v1@19.37,11.364 v1(19.304,11.43) 19.774,11.9 C13.1 ; v1(27.051,30.353) 28.055,30.353 5V.1 ; R4.1 28.471,24.222 v1(28.471,22.248) 28.471,22.162 30.734,19.898 Signal.1 30.617,19.812 29.982,19.177 C6.1
  other v1: 9.083,21.966
"Motor Power": C12.1 MotorPower.1 R8.2 R9.2 | length 13.4
  Top Layer w0.254: R9.2 R9.2@18.905,16.853 ; 19.953,15.805 23.193,15.805 23.718,15.281 23.718,13.77 22.86,12.912 R8.2 23.838,12.865 24.709,11.994 MotorPower.1
Motor_ADC: C13.2 Signal.2 U2.8 U2.9 | length 21.1
  Top Layer w0.254: U2.8 20.282,13.208 C13.2 ; U2.9 20.366,13.708 C13.2 ; v1(21.717,11.557) 21.717,12.357 C13.2
  Bottom Layer w0.254: v1(21.717,11.557) 21.717,13.335 Signal.2
Motor_Alert: R5.1 R12.1 Signal.4 U2.3 | length 41.6
  Top Layer w0.254: R5.1 8.14,10.822 9.564,9.398 v1(10.414,9.398) 10.508,9.398 10.672,9.562 10.705,9.562 12.775,11.632 12.775,12.651 13.309,13.185 14.135,13.185 U2.3
  Bottom Layer w0.254: R12.1 5.822,8.827 6.063,9.067 6.126,9.067 6.457,9.398 v1(10.414,9.398) 12.192,11.176 12.192,11.303 20.166,19.277 22.579,19.277 Signal.4
Motor_Reset: Signal.3 U2.4 | length 26.8
  Top Layer w0.254: v1(13.152,10.444) 13.156,10.448 13.156,12.493 13.348,12.685 14.135,12.685 U2.4
  Bottom Layer w0.254: v1(13.152,10.444) 13.218,10.51 13.463,10.51 13.467,10.515 15.341,10.515 29.845,25.019 30.607,25.019 Signal.3
NetC1_1: C1.1 C8.1 L1.1 R2.2 R4.2 U1.2 | length 26.7
  Top Layer w0.254: L1.1@13.237,24.76 13.246,24.76 13.734,24.272 L1.1@13.734,23.904 ; L1.1@14.245,22.815 v1(14.935,22.126) ; v1(20.32,22.606) 20.414,22.606 20.658,22.85 22.046,22.85 22.723,22.173 25.52,24.97 25.52,25.127 R4.2 ; C1.1 22.979,25.227 23.83,25.227 v1(23.876,25.273) ; R2.2@22.775,22.225 25.108,22.225 C8.1
  Top Layer w0.92: L1.1@14.115,23.396 U1.2
  Top Layer w1.3: L1.1 L1.1@14.115,23.396
  Bottom Layer w0.254: v1@15.062,22.126 19.837,22.126 20.317,22.606 v1(20.32,22.606) 21.209,22.606 v1(23.876,25.273)
NetC1_2: C1.2 R1.2 | length 1.7
  Top Layer w0.254: R1.2 20.965,26.514 22.546,26.514 C1.2
NetC8_2: C8.2 R2.1 U1.4 | length 9.6
  Top Layer w0.254: U1.4 18.763,22.385 19.564,22.385 20.105,21.844 21.25,21.844 R2.1@21.473,22.067 ; R2.1 R2.1@21.473,22.067 ; C8.2 25.829,21.346 22.15,21.346 21.473,22.023 R2.1@21.473,22.067
NetCN2_2: R6.1 USB.2 | length 2.5
  Bottom Layer w0.254: R6.1 17.129,31.981 USB.2
NetCN2_3: R6.2 USB.3 | length 2.4
  Bottom Layer w0.254: USB.3 15.129,32.235 R6.2
NetD1_2: 5V.2 R10.2 | length 3
  Top Layer w0.254: R10.2 27.992,31.79 5V.2
NetD2_2: 3V3.2 R11.2 | length 4.2
  Top Layer w0.254: 3V3.2 1.155,12.319 v1(2.159,12.319)
  Bottom Layer w0.254: v1(2.159,12.319) 2.225,12.385 2.718,12.385 4.457,14.124 R11.2
NetD3_2: MotorAlert.2 R12.2 | length 3.6
  Top Layer w0.254: MotorAlert.2 1.85,8.497 2.116,8.763 v1(2.159,8.763)
  Bottom Layer w0.254: v1(2.159,8.763) R12.2
NetR1_1: R1.1 U1.6 | length 2.9
  Top Layer w0.254: U1.6@18.211,24.346 U1.6 19.193,24.346 19.652,24.804 R1.1
NetR3_1: R3.1 U1.5 | length 9.8
  Top Layer w0.254: U1.5 20.054,23.396 23.142,23.396 24.638,24.892 24.638,26.797 25.266,27.425 25.266,27.54 R3.1
NetR7_1: R7.1 U2.1 | length 4.2
  Top Layer w0.254: R7.1 10.677,12.7 11.081,13.104 11.081,13.151 12.138,14.208 U2.1
NetR8_1: R8.1 U2.10 | length 4.4
  Top Layer w0.254: U2.10 19.133,14.208 19.492,14.567 R8.1
VBATT: BATT.2 C5.1 C6.2 C7.2 C12.2 R7.2 R9.1 U1.3 | length 0
  Top Layer w0.75: BATT.2 BATT.2@12.712,4.995
pads on no net: CN5.1 CN6.1 CN7.1 CN8.1 U2.6 U3.4

## Polygon pours and split planes (outlines as drawn)
VBATT on Top Layer "VBATT_L01_P018" (solid, remove dead copper, pour order 18): 2.54,0 2.54,15.621 4.699,17.653 8.89,17.653 8.89,21.971 12.446,21.971 13.335,22.86 24.892,22.86 27.686,20.066 27.686,17.399 16.002,17.399 16.002,10.033 32.385,10.033 32.385,0
"Motor Power" on Top Layer "MOTOR_POWER_L01_P017" (solid, remove dead copper, pour order 17): 16.002,17.399 32.385,17.399 32.385,8.382 16.002,8.382
5V on Top Layer "5V_L01_P009" (solid, remove dead copper, pour order 9): 8.81,17.91 8.975,22.098 12.446,22.098 14.986,25.4 15.113,25.42 32.385,25.527 32.385,43.053 0,43.053 0,17.78
GND on Bottom Layer "GND_L02_P016" (solid, remove dead copper, pour order 16): 0,43.053 32.385,43.053 32.385,0 0,0

## Keep-outs
Keep-Out Layer:
  lines w0.254: 0,0 32.385,0 32.385,43.048 32.38,43.053 0,43.053 0,0

## Silkscreen, mask and mechanical layers (free items; w line width, h text height)
Bottom Overlay:
  text "Marie Nikkel Quad Squad / PD board 1.0 Jan 2021" at 25.273,34.671 h0.8